# Altium PCB V1_0.PcbDoc
Units mm, origin at the board's own origin, x right, y up, seen from the top; angles counter-clockwise.
Board outline 83.82 x 79.88 mm, 2 copper layers (Top Layer, Bottom Layer); 29 components, 24 nets, 142 pads, 11 vias.
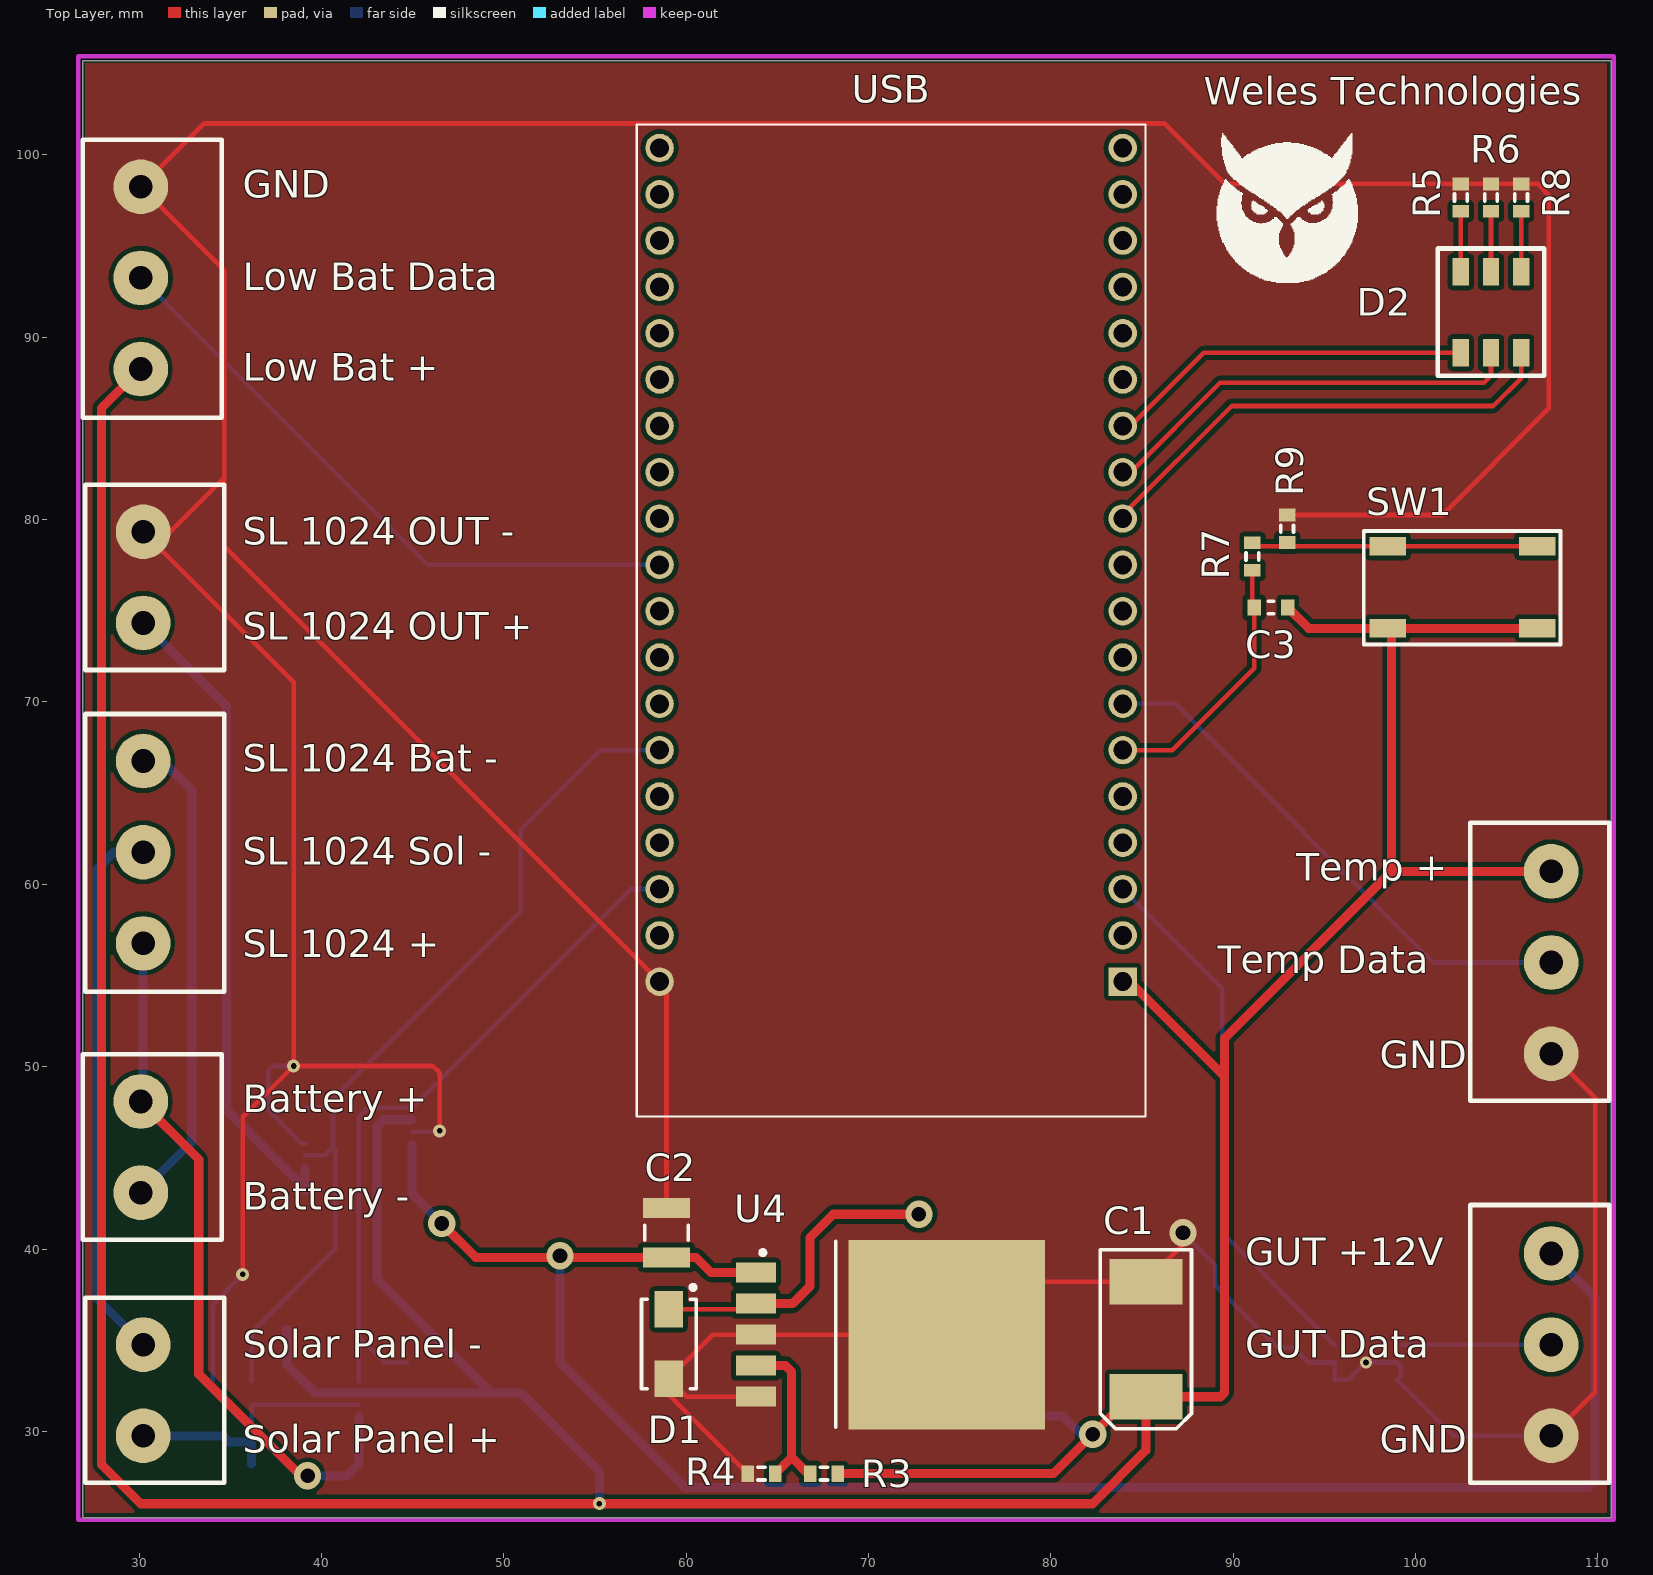
[diagram p0: Top Layer view]
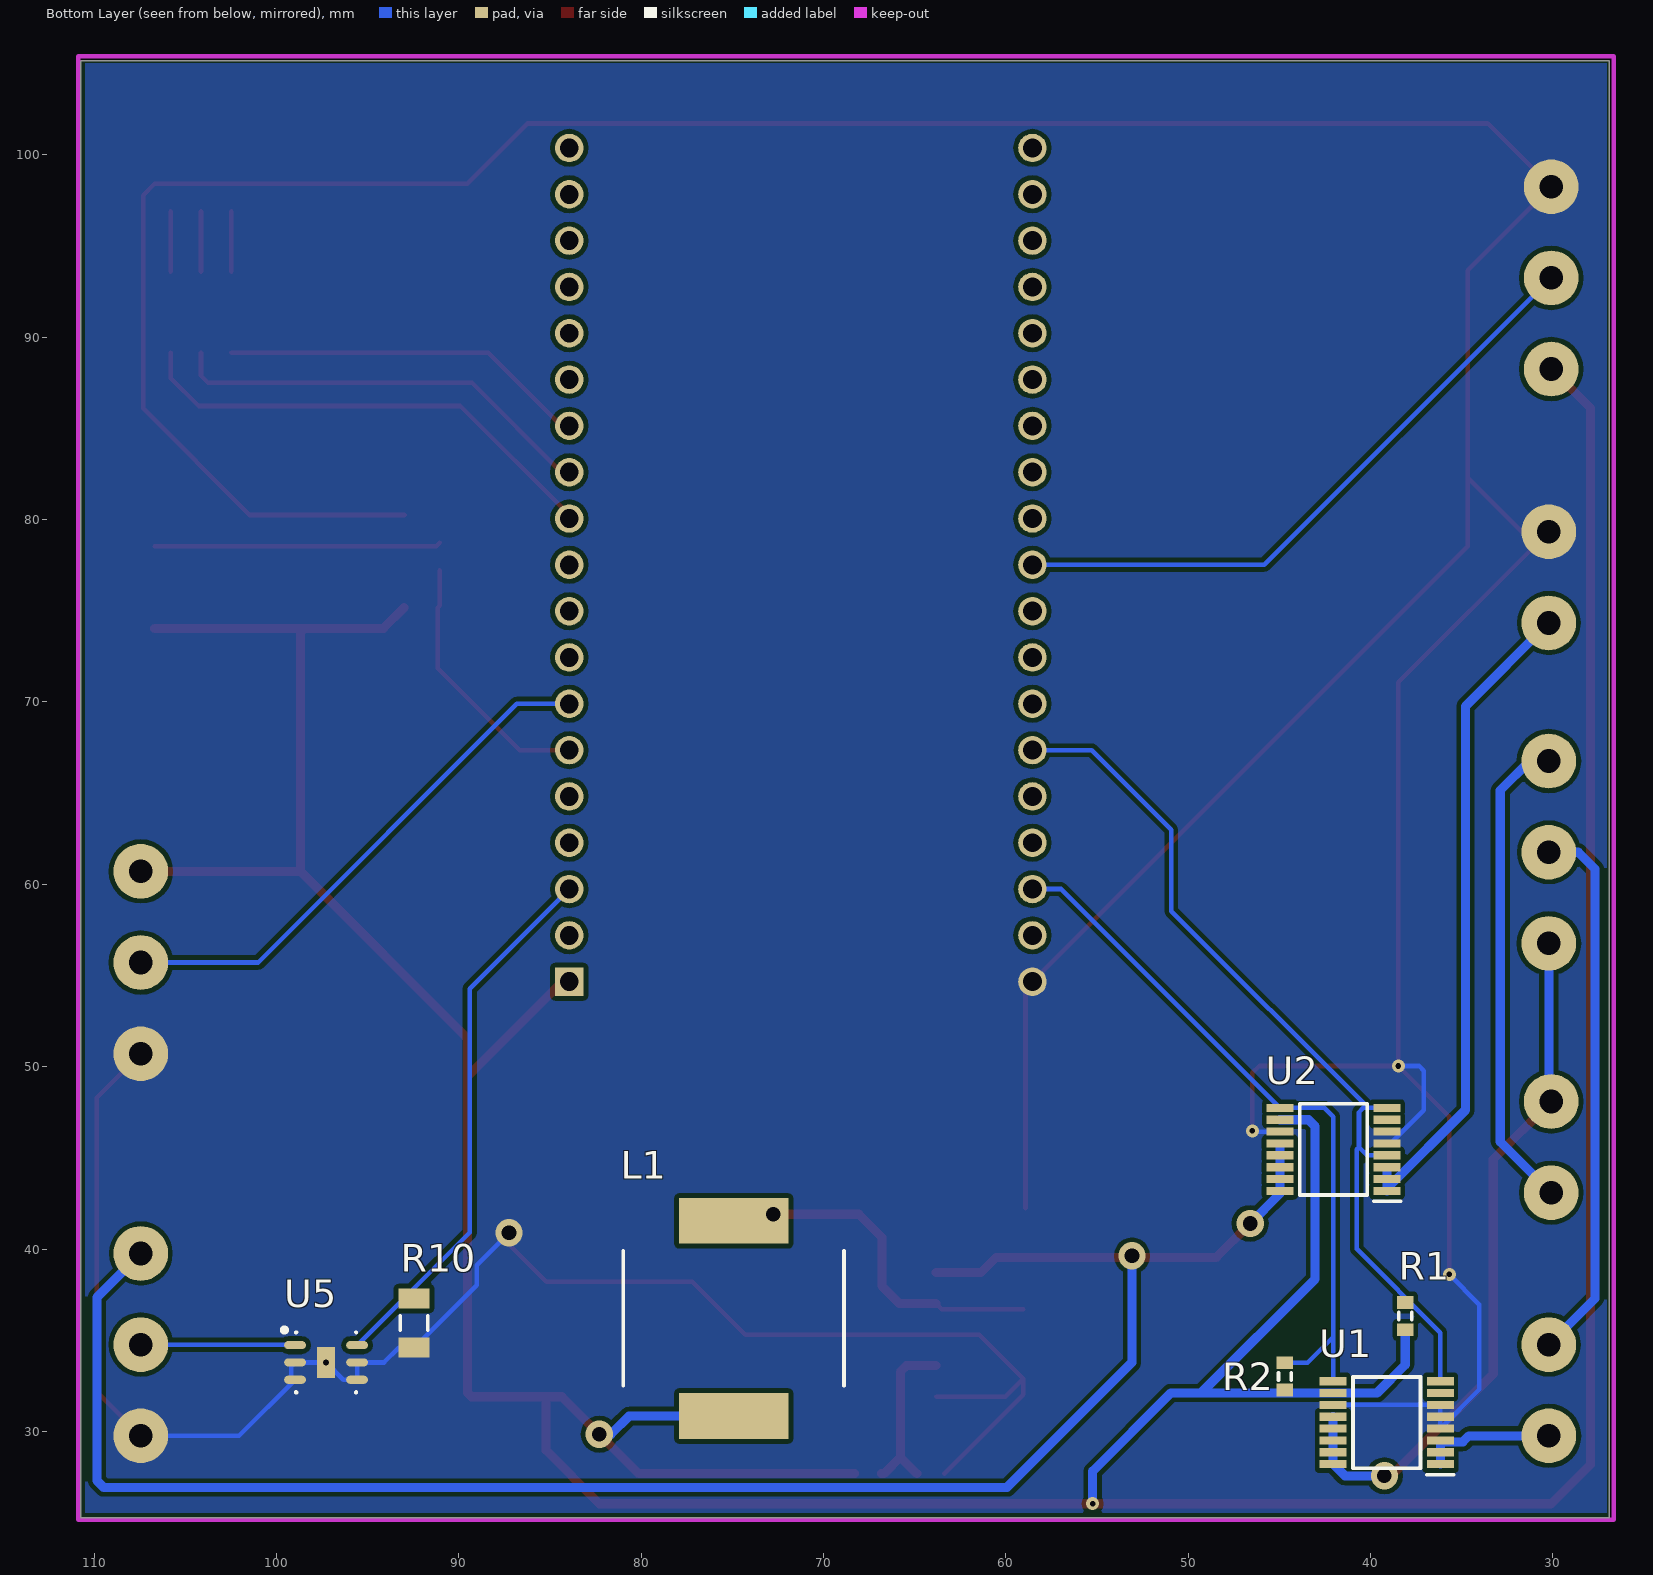
[diagram p1: Bottom Layer view, seen from below]
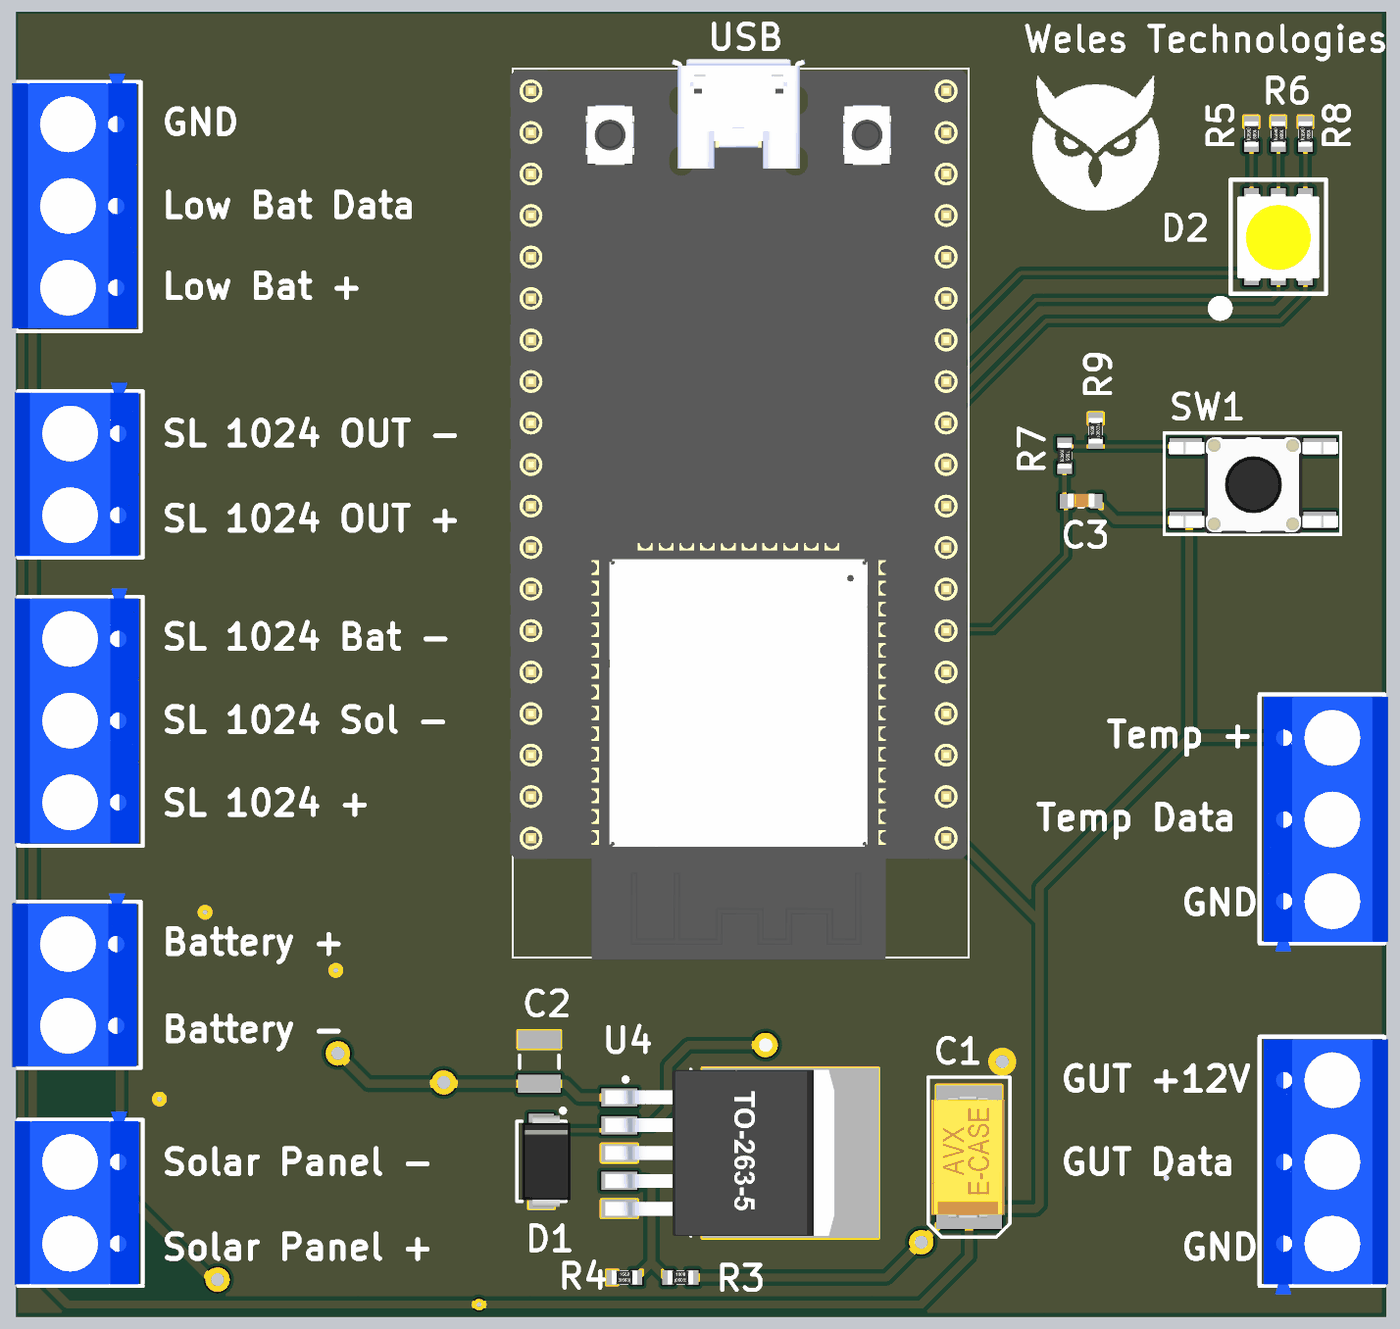
[diagram p2: 3D render of the assembled board from above, using the file's embedded part models]
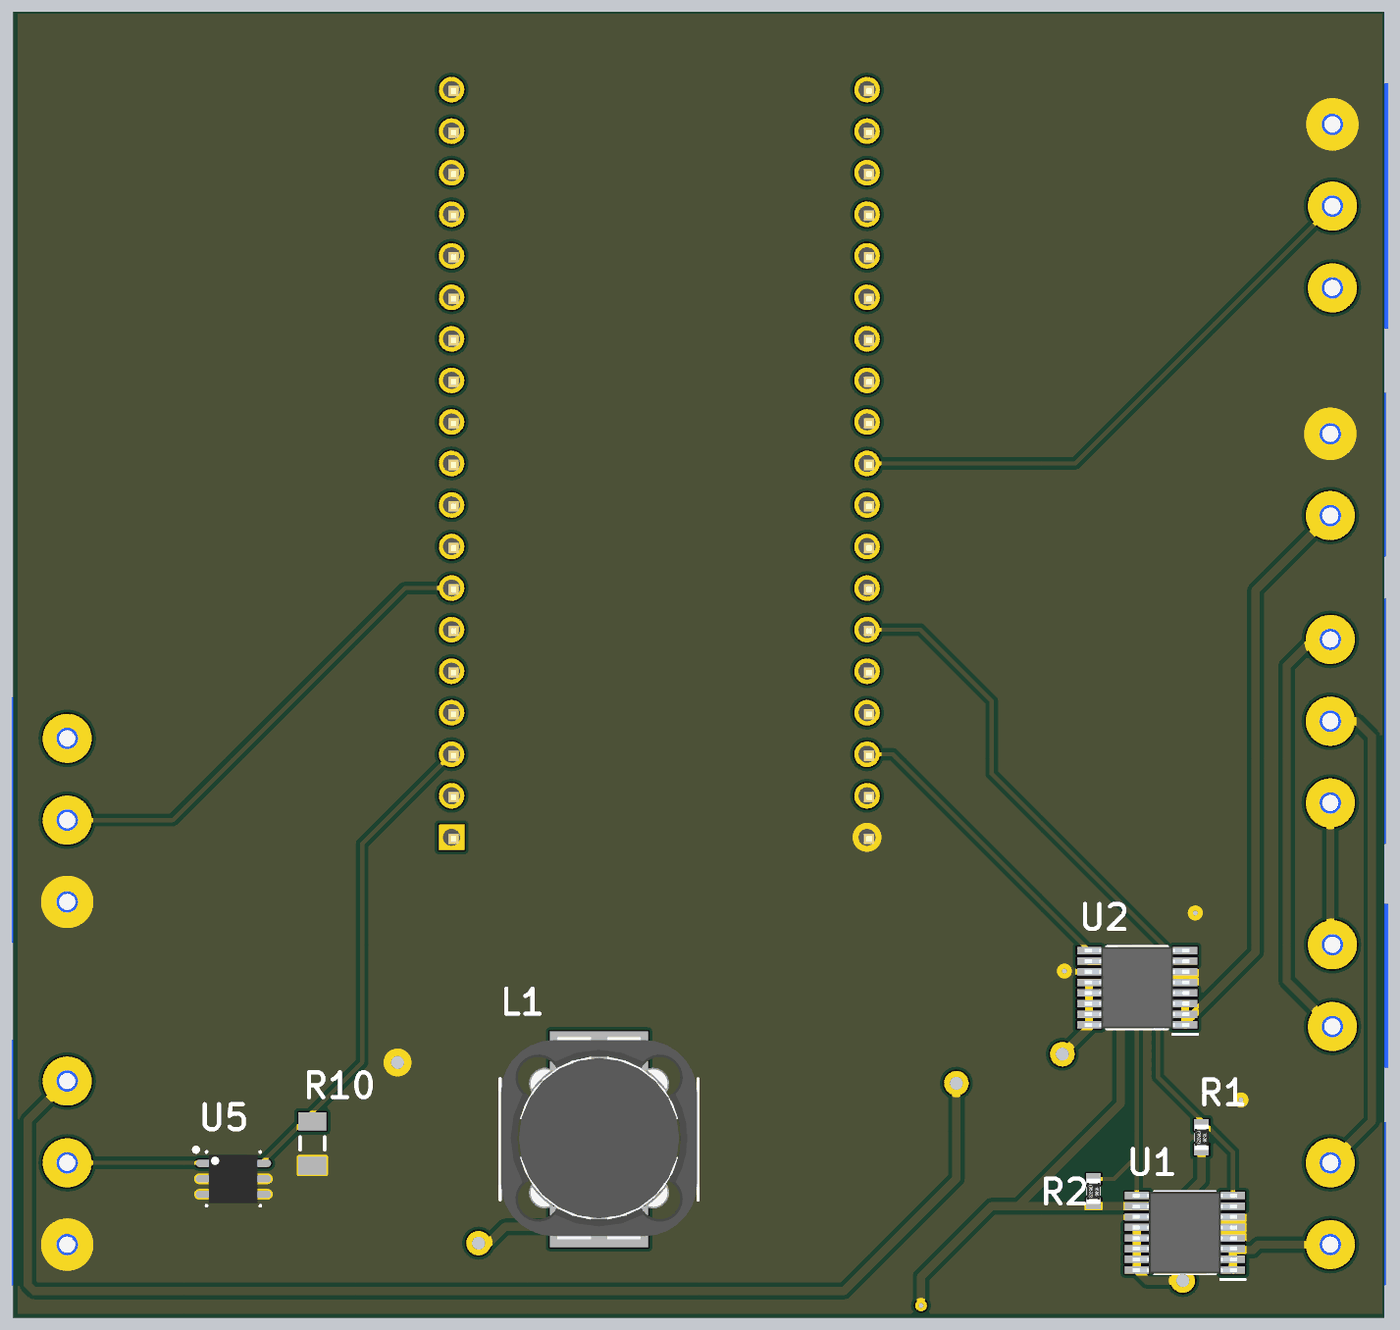
[diagram p3: 3D render of the assembled board from below, using the file's embedded part models]

## Layer stack, top to bottom
Top Solder: solder mask 0.0102, Solder Resist, Dk 3.5
Top Layer: signal copper 0.0356
Dielectric 1: dielectric 0.32, FR-4, Dk 4.8
Bottom Layer: signal copper 0.0356
Bottom Solder: solder mask 0.0102, Solder Resist, Dk 3.5

## Board outline
110.744,25.273 110.744,105.156 26.924,105.156 26.924,25.273

## Design rules (kind name [scope] priority, off if disabled: settings)
Clearance [All] p1: gap=0.254 ignorepadtopadclearanceinfootprint=FALSE except(0: Arc-Hole Track-Hole SMDPad-Hole THPad-Hole Via-Hole Fill-Hole Poly-Hole Region-Hole Text-Hole)
PolygonConnect [All] p1: connectstyle=Direct reliefconductorwidth=0.254 reliefentries=4 polygonreliefangle="90 Angle" airgapwidth=0.254
RoomDefinition V1_0 [InComponentClass('V1_0')] p1: confinementstyle=ConfineIn formatcopy=TRUE lockcomponents=FALSE outline 178.943,27.051 407.797,27.051 407.797,85.09 178.943,85.09
RoutingVias [All] p1: holewidth=0.711 width=1.27 viastyle="Through Hole" minholewidth=0.711 minwidth=1.27 maxholewidth=0.711 maxwidth=1.27
SolderMaskExpansion [All] p1: expansion=0.102
Width PWR [InNet('BAT+')] p1: maxlimit=0.5 minlimit=0.5 preferedwidth=0.5
Width [All] p2: maxlimit=0.254 minlimit=0.254 preferedwidth=0.254
30 further rules are at their usual default settings.

## Classes and differential pairs
component class V1_0: C1 C2 C3 D1 D2 L1 P1 P2 P3 P4 P5 P6 R1 R2 R3 R4 R5 R6 R7 R8 R9 R10 SW1 U1 U2 U4 U5

## Components (designator, comment, footprint, x,y, rotation, side; value= is the part's Value field where it differs from the comment)
C1 "Capacitor Tantalum" "Capacitor -Tantalum E size SMD" 85.217,35.052 r270 top value=220uF
C2 "Ceramic Capacitor" CAPC3225L 58.928,40.894 r270 top value=4,7uF
C3 "Capacitor" "CAP 0603" 92.075,75.184 r0 top value=0.1uF
D1 "Diode Schottky" DIOM4427X20N 59.055,34.798 r270 top
D2 "RGB 5050" "LED 5050" 105.791,89.154 r90 top
L1 "Coil" CDRH127 74.93,36.195 r90 bottom value=100uH
P1 "BAT" DG301_2pin 30.099,45.593 r270 top
P2 "SOLAR_PANEL" DG301_2pin 30.226,32.258 r270 top
P3 "SL1024 IN" DG301_3pin 30.226,64.262 r270 top
P4 "SL1024 OUT" DG301_2pin 30.226,76.835 r270 top
P5 "BAT_LOW_INDICATE" DG301_3pin 30.099,95.758 r270 top
P6 "GUT" DG301_3pin 107.442,32.258 r90 top
P7 "TEMP" DG301_3pin 107.442,53.213 r90 top
R1 "" RES1608 38.608,38.1 r270 bottom value=4.7K
R2 "" RES1608 45.212,34.798 r270 bottom value=4.7K
R3 "" RES1608 65.786,27.178 r0 top value=7.9K
R4 "" RES1608 62.357,27.178 r0 top value=4.7K
R5 "" RES1608 101.981,99.441 r270 top value=500
R6 "" RES1608 103.632,99.441 r270 top value=500
R7 "" RES1608 90.551,79.756 r270 top value=10K
R8 "" RES1608 105.283,99.441 r270 top value=500
R9 "" RES1608 93.472,77.724 r90 top value=100K
R10 "Resistor" RESC3216L 92.456,35.941 r90 bottom value=10K
SW1 "SW-34" SW-34 106.68,74.041 r180 top
U1 "INA260AIPW" SOP65P640X120-16N 39.116,30.48 r0 bottom
U2 "INA260AIPW" SOP65P640X120-16N 42.037,45.466 r0 bottom
U4 "IC" "TO170P1435X450-6N - duplicate" 70.358,35.306 r0 top
U5 "MAX14626" TDFN-6 97.282,33.782 r180 bottom
USB "ESP32-DEVKITC-32D" *MODULE_ESP32-DEVKITC-32D 71.247,74.422 r180 top (schematic designator U3)

## Footprints (in the part's own frame and the unit in brackets; to place one, negate y for a bottom-side part, rotate by r counter-clockwise, add the part's x,y. Pads: shape width x height; smd on the part's side, far side on the other; paste and mask are expansions set on the pad)
*MODULE_ESP32-DEVKITC-32D [mm]
  rect 1.56x1.56 hole 1.04: 1(-12.7,19.76)
  round 1.56 hole 1.04: 2(-12.7,17.22) 3(-12.7,14.68) 4(-12.7,12.14) 5(-12.7,9.6) 6(-12.7,7.06) 7(-12.7,4.52) 8(-12.7,1.98) 9(-12.7,-0.56) 10(-12.7,-3.1) 11(-12.7,-5.64) 12(-12.7,-8.18) 13(-12.7,-10.72) 14(-12.7,-13.26) 15(-12.7,-15.8) 16(-12.7,-18.34) 17(-12.7,-20.88) 18(-12.7,-23.42) 19(-12.7,-25.96) 20(12.7,19.76) 21(12.7,17.22) 22(12.7,14.68) 23(12.7,12.14) 24(12.7,9.6) 25(12.7,7.06) 26(12.7,4.52) 27(12.7,1.98) 28(12.7,-0.56) 29(12.7,-3.1) 30(12.7,-5.64) 31(12.7,-8.18) 32(12.7,-10.72) 33(12.7,-13.26) 34(12.7,-15.8) 35(12.7,-18.34) 36(12.7,-20.88) 37(12.7,-23.42) 38(12.7,-25.96)
  silkscreen extent -13.95,-27.25 13.95,27.15, body extent -13.84,-27.81 14.1,27.29, height 7.25
"CAP 0603" [mm] "Chip Capacitor, 2-Leads, Body 1,7x0,8mm, IPC Medium Density"
  rect 0.75x0.9 smd: 1(-0.925,0) 2(0.925,0)
  silkscreen extent -0.15,-0.35 0.15,0.35, body extent -0.85,-0.38 0.85,0.49, height 0.87
"Capacitor -Tantalum E size SMD" [mm]
  rect 2.5x4 smd: 1(-3.15,0) 2(3.15,0)
  silkscreen extent -4.9,-2.5 4.9,2.5, body extent -3.7,-2.29 3.7,2.16, height 4.2
CAPC3225L [mm] "Chip Capacitor, Body 3.2x2.5mm, IPC High Density"
  rect 1.1x2.6 smd: 1(-1.35,0) 2(1.35,0)
  silkscreen extent -0.4,-1.2 0.4,1.2, body extent -1.7,-1.35 1.7,1.35, height 1.5
CDRH127 [mm] "Chip Inductor, 2-Leads, Body 12.2x12.2mm, IPC Medium Density"
  rect 2.5x6 smd: 1(-5.35,0) 2(5.35,0)
  silkscreen extent -3.7,-6.05 3.7,6.05, body extent -6.1,-6 6.25,6, height 7.4
DG301_2pin [mm]
  round 3 hole 1.3: 1(-2.5,0) 2(2.5,0)
  silkscreen extent -5.08,-3.18 5.08,4.45, body extent -5.6,-3.4 5,4.2, height 10.1
DG301_3pin [mm]
  round 3 hole 1.3: 1(-2.5,0) 2(2.5,0) 3(7.5,0)
  silkscreen extent -5.08,-3.18 10.16,4.45, body extent -5.6,-3.4 10,4.2, height 10.1
DIOM4427X20N [mm] "Molded Diode, 2-Leads, Body 4,4x2,7mm, IPC Medium Density"
  rect 2x1.55 smd: 1(-1.905,0) 2(1.905,0)
  silkscreen extent -3.22,-1.5 2.45,1.5, body extent -2.8,-1.17 2.8,1.78, height 2.7
"LED 5050" [mm]
  round 1.524 on Top Overlay: 1(-2.159,5.207)
  rect 1.5x0.9 smd: 1(0,3.302) 2(0,1.651) 3(0,0) 4(4.445,3.302) 5(4.445,1.651) 6(4.445,0)
  silkscreen extent -1.27,-1.27 5.71,4.57, body extent -0.47,-0.85 4.83,4.15, height 1.6
RES1608 [mm]
  rect 0.7x0.9 smd: 1(1.028,0.508) 2(2.528,0.508)
  silkscreen extent 1.58,0.16 1.98,0.86, body extent 1,0.08 2.55,0.93, height 0.45
RESC3216L [mm] "Chip Resistor, Body 3.1x1.6mm, IPC High Density"
  rect 1.1x1.7 smd: 1(-1.35,0) 2(1.35,0)
  silkscreen extent -0.4,-0.75 0.4,0.75, body extent -1.68,-0.87 1.68,0.87, height 2.54
SOP65P640X120-16N [mm]
  rect 1.475x0.45 smd: 1(-2.938,2.275) 2(-2.938,1.625) 3(-2.938,0.975) 4(-2.938,0.325) 5(-2.938,-0.325) 6(-2.938,-0.975) 7(-2.938,-1.625) 8(-2.938,-2.275) 9(2.938,-2.275) 10(2.938,-1.625) 11(2.938,-0.975) 12(2.938,-0.325) 13(2.938,0.325) 14(2.938,0.975) 15(2.938,1.625) 16(2.938,2.275)
  silkscreen extent -3.67,-2.5 1.85,2.85, body extent -3.2,-2.5 3.2,2.5, height 1.2
SW-34 [mm]
  rect 2x1 smd: 1(0,0) 1(8.2,0) 2(0,-4.5) 2(8.2,-4.5)
  silkscreen extent -1.27,-5.33 9.53,0.89, body extent -1.11,-5.16 9.24,0.84, height 7.3
TDFN-6 [mm] "QFN, 12-Leads, Body 3.2x3.2mm (max), Pitch 0.95mm, IPC Medium Density"
  oval 1.2x0.45 smd: 1(-1.7,0.95) 2(-1.7,0) 3(-1.7,-0.95) 4(1.7,-0.95) 5(1.7,0) 6(1.7,0.95)
  rect 1x1.7 smd: 7(0,0)
  silkscreen extent -2.41,-1.65 1.65,1.9, body extent -1.54,-1.5 1.5,1.5, height 0.75
"TO170P1435X450-6N - duplicate" [mm] "D2-PAK, 6-Pads, Body 8,6x10,2mm (max), IPC Medium Density"
  rect 2.2x1.1 smd: 1(-6.531,3.4) 2(-6.531,1.7) 3(-6.531,0) 4(-6.531,-1.7) 5(-6.531,-3.4)
  rect 10.8x10.4 smd: 6(3.937,0)
  silkscreen extent -6.27,-5.08 -2.16,5.12, body extent -7.39,-5.1 7.85,5.1, height 4.56

## Part data
C1: library part Cap_tantal, Power/Voltage=10V, Tolerance=+-10%, PackageDescription=SMD, PackageReference=Size-E
C2: library part "Cap Semi", "Capacitor (Semiconductor SIM Model)", Power/Voltage=50V, Tolerance=+-10%, LatestRevisionDate=29-May-2009, LatestRevisionNote="IPC-7351 Footprint Added.", PackageDescription=SMD, PackageReference=C1210, Published=8-Jun-2000, Publisher="Altium Limited"
D1: library part Shotky_Diode, Manufacturer="International Rectifier", PartNumber=10MQ040NTRPBF, Name=10MQ040NTRPBF, PackageDescription="SMA (DO-214AC)"
L1: "Inductor", Manufacturer=Sumida, PartNumber=CDRH127/LD, Tolerance=+-20%
P1 P2 P4: library part 2_pin, "DG301"
P3 P5 P6 P7: library part 3_PIN, "DG301"
R1 R2 R3 R4 R5 R6 R7 R8 R9: library part "Res Semi", "Semiconductor Resistor", LatestRevisionDate=17-Jul-2002, LatestRevisionNote="Re-released for DXP Platform.", PackageReference=AXIAL-0.5, Published=8-Jun-2000, Publisher="Altium Limited"
R10: library part "Res Semi", "Semiconductor Resistor", Power/Voltage=0.25W, Tolerance=+-5%, LatestRevisionDate=17-Jul-2002, LatestRevisionNote="Re-released for DXP Platform.", PackageDescription=SMD, PackageReference=R1206, Published=8-Jun-2000, Publisher="Altium Limited"
U1 U2: "Integrated Circuit", Manufacturer_Name="Texas Instruments", Mouser Part Number=595-INA260AIPW, Datasheet Link=http://www.ti.com/lit/gpn/ina260, Height=1.2mm, Manufacturer_Part_Number=INA260AIPW, Mouser Price/Stock=https://www.mouser.com/Search/Refine.aspx?Keyword=595-INA260AIPW
U4: library part LM2575, Manufacturer="TEXAS INSTRUMENTS", PartNumber=LM2576, PackageDescription=TO-263-5
U5: "4–20mA  Current Loop Protector"
USB: "Eval Board For Esp-Wroom-32", Package=None, Availability=Unavailable, MF="Espressif Systems", MP=ESP32-DEVKITC-32D, Price=None, SnapEDA_Link=https://www.snapeda.com/parts/ESP32-DEVKITC-32D/Espressif%20Systems/view-part/?ref=snap

## Via types
v1: diameter 1.5, hole 0.8, Top Layer to Bottom Layer, 6 vias
v2: diameter 0.711, hole 0.305, Top Layer to Bottom Layer, 4 vias
v3: diameter 0.66, hole 0.33, Top Layer to Bottom Layer, tented top, 1 vias

## Nets (pads, with @x,y where several pads share a name; then routed paths per layer and width w, separated by ;. In a path a pad name is that pad's centre, name@x,y a point inside that pad or via, vN(x,y) a via of type N, cw(c..) or ccw(c..) an arc to the next point about the centre after c; other vN are vias at no path point)
1Wire: P7.2 USB.7 | length 29.4
  Bottom Layer w0.254: USB.7 86.816,69.902 101.005,55.713 P7.2
4_20mA_In: P6.2 U5.1 | length 8.2
  Bottom Layer w0.254: U5.1@99.21,34.758 P6.2
Analog_In: R10.2 U5.6 USB.3 | length 29.8
  Bottom Layer w0.254: USB.3 89.408,54.281 89.408,40.906 U5.6
BAT+: P1.1 P3.3 U1.12 U1.13 U1.14 U1.15 U1.16 | length 38.9
  Top Layer w0.5: P1.1 33.274,44.918 33.274,33.147 38.862,27.559 v1(39.243,27.559)
  Bottom Layer w0.5: P1.1 30.226,48.22 P3.3 ; v1(39.243,27.559) 41.408,27.559 U1.16 U1.15 U1.14 U1.13 U1.12
BAT-: P1.2 P3.1 | length 26.5
  Bottom Layer w0.5: P1.2 32.893,45.887 32.893,65.151 31.282,66.762 P3.1
Btn: C3.1 R7.2 USB.6 | length 14.5
  Top Layer w0.254: USB.6 86.666,67.362 91.15,71.846 C3.1 91.059,75.275 R7.2
"Discharge Notify": P5.2 USB.29 | length 35
  Bottom Layer w0.254: P5.2 45.835,77.522 USB.29
GND: C1.1 C2.1 D1.2 P4.1 P5.1 P6.1 P7.1 R4.1 R5.1 R6.1 R8.1 R9.2 R10.1 U1.4 U1.5 U1.6 U1.11 U2.5 U2.6 U2.11 U4.3 U4.5 U4.6 U5.2 U5.3 U5.4 U5.5 U5.7 USB.20 | length 358.2
  Top Layer w0.254: P4.1 31.71,79.335 34.671,82.296 ; P4.1@30.567,78.994 38.481,71.08 v2(38.481,50.038) ; v2(35.687,38.608) 35.687,47.244 v2(38.481,50.038) ; v2(46.482,46.482) 46.482,49.657 46.101,50.038 v2(38.481,50.038) ; C2.1 58.928,54.281 USB.20 34.671,78.538 34.671,82.296 ; R4.1 59.055,32.016 D1.2 ; U4.5 60.042,31.906 D1.2 ; v1(87.249,40.894) 87.249,40.234 C1.1 77.191,38.202 U4.6 U4.3 61.468,35.306 D1.2 ; R9.2 101.461,80.252 107.315,86.106 107.315,97.79 106.692,98.413 R8.1 R6.1 R5.1 89.547,98.413 86.233,101.727 33.568,101.727 P5.1 34.671,93.686 34.671,82.296 ; P6.1 109.855,32.171 109.855,48.3 P7.1
  Bottom Layer w0.254: v2(35.687,38.608) 34.036,36.957 34.036,32.297 U1.4 U1.5 U1.6 U1.11 ; v2(38.481,50.038) 37.338,50.038 37.084,49.784 37.084,47.605 38.898,45.791 U2.5 ; U2.11 46.441,46.441 v2(46.482,46.482) ; v1(87.249,40.894) 89.027,39.116 89.027,38.02 R10.1 93.298,34.591 94.107,33.782 U5.5 U5.4 96.332,32.832 v3(97.282,33.782) U5.2 99.187,33.577 99.187,33.037 U5.3 102.056,29.758 P6.1
IO12: D2.1@102.489,89.154 USB.13 | length 20.2
  Top Layer w0.254: USB.13 84.38,85.142 88.392,89.154 D2.1@102.489,89.154
IO14: D2.2 USB.12 | length 23.7
  Top Layer w0.254: USB.12 84.38,82.602 89.281,87.503 103.759,87.503 104.14,87.884 D2.2
IO27: D2.3 USB.11 | length 26.5
  Top Layer w0.254: USB.11 83.947,80.264 89.916,86.233 104.267,86.233 105.791,87.757 D2.3
NetD1_1: D1.1 L1.2 U4.2 | length 17.4
  Top Layer w0.254: D1.1 63.524,36.703 U4.2
  Top Layer w0.5: U4.2 65.835,37.006 66.802,37.973 66.802,40.64 68.072,41.91 v1(72.771,41.91)
NetD2_4: D2.4 R5.2 | length 3.3
  Top Layer w0.254: D2.4 R5.2
NetD2_5: D2.5 R6.2 | length 3.3
  Top Layer w0.254: D2.5 R6.2
NetD2_6: D2.6 R8.2 | length 3.3
  Top Layer w0.254: D2.6 R8.2
NetR3_1: R3.1 R4.2 U4.4 | length 9.5
  Top Layer w0.5: U4.4 65.454,33.606 65.786,33.274 65.786,28.587 ; R4.2 65.786,28.587 ; R3.1 66.687,27.686 65.786,28.587
NetR7_1: R7.1 R9.1 SW1.2 | length 15.7
  Top Layer w0.254: R7.1 91.246,78.541 98.48,78.541 SW1.2@106.68,78.541
SCL: R2.1 U1.9 U2.9 USB.22 | length 39.4
  Bottom Layer w0.254: U1.9 42.054,35.179 ; R2.1 43.463,33.77 42.054,35.179 ; USB.22 56.976,59.742 U2.9 42.534,47.741 42.054,47.261 42.054,35.179
SDA: R1.1 U1.8 U2.4 U2.8 USB.25 | length 49.2
  Bottom Layer w0.254: U1.8 36.178,35.416 40.767,40.005 40.767,45.466 40.64,45.593 ; U2.4 40.188,45.141 40.64,45.593 ; U2.8 40.132,47.741 ; USB.25 55.297,67.362 50.927,62.992 50.927,58.536 40.132,47.741 ; 40.132,47.741 40.397,47.741 40.64,47.498 40.64,45.593
SL_OUT+: P4.2 U2.1 U2.2 U2.3 | length 35.8
  Bottom Layer w0.5: P4.2 34.798,69.763 34.798,47.625 38.989,43.434 ; U2.1 U2.2 U2.3@39.099,44.412
SP+: P2.2 U1.1 U1.2 U1.3 | length 7.3
  Bottom Layer w0.5: P2.2 34.609,29.758 34.941,29.426 36.178,29.426 U1.2 U1.1
SP-: P2.1 P3.2 | length 30.1
  Bottom Layer w0.5: P2.1 27.686,37.298 27.686,60.833 28.615,61.762 P3.2
V_In: C2.2 P6.3 U2.12 U2.13 U2.14 U2.15 U2.16 U4.1 | length 102.4
  Top Layer w0.5: v1(46.609,41.402) 48.467,39.544 C2.2 60.532,39.544 61.37,38.706 U4.1
  Bottom Layer w0.5: U2.12@44.975,45.712 U2.13 U2.14 U2.15 U2.16 44.975,43.036 v1(46.609,41.402) ; v1(53.086,39.624) 53.086,33.782 59.944,26.924 109.474,26.924 109.855,27.305 109.855,37.345 P6.3
VCC: C1.2 C3.2 L1.1 P5.3 P7.3 R1.2 R2.2 R3.2 SW1.1 U1.10 U2.10 USB.1 | length 273.5
  Top Layer w0.5: P5.3 27.94,86.099 27.94,28.194 30.099,26.035 v2(55.245,26.035) 82.296,26.035 85.217,28.956 C1.2 ; R3.2 80.137,27.686 v1(82.296,29.845) 84.353,31.902 C1.2 ; USB.1@83.82,55.17 89.535,49.455 ; C3.2 94.143,74.041 SW1.1@98.48,74.041 ; SW1.1@106.68,74.041 SW1.1@98.48,74.041 ; P7.3 98.686,60.713 ; C1.2 89.306,31.902 89.535,32.131 89.535,49.455 ; 89.535,49.455 89.535,51.562 98.686,60.713 ; SW1.1@98.48,74.041 98.686,73.835 98.686,60.713
  Bottom Layer w0.5: R1.2 38.1,33.655 39.65,32.105 U1.10 49.302,32.105 ; U2.10 43.408,47.091 43.053,46.736 43.053,38.354 49.302,32.105 ; v2(55.245,26.035) 55.245,27.813 50.953,32.105 49.302,32.105 ; L1.1 80.661,30.845 81.661,29.845 v1(82.296,29.845)
pads on no net: D2.1@100.584,86.995 U1.7 U2.7 USB.2 USB.4 USB.5 USB.8 USB.9 USB.10 USB.14 USB.15 USB.16 USB.17 USB.18 USB.19 USB.21 USB.23 USB.24 USB.26 USB.27 USB.28 USB.30 USB.31 USB.32 USB.33 USB.34 USB.35 USB.36 USB.37 USB.38

## Polygon pours and split planes (outlines as drawn)
GND on Top Layer "Top Layer-No Net" (solid, remove dead copper, pour order 0): 26.67,105.41 26.67,25.146 110.744,25.146 110.871,25.273 110.871,105.41
GND on Bottom Layer "Top Layer-No Net" (solid, remove dead copper, pour order 2): 26.67,105.41 110.871,105.41 110.871,25.146 26.67,25.146

## Keep-outs
Keep-Out Layer:
  lines w0.254: 26.67,25.146 26.67,98.933 26.67,105.41 110.871,105.41 110.871,26.924 110.871,25.146 26.67,25.146

## Silkscreen, mask and mechanical layers (free items; w line width, h text height)
Top Overlay:
  drawing of 378 lines, arcs and shapes, not listed
  text "Weles Technologies" at 88.392,102.743 h1.52
  text "GND" at 35.687,97.663 h1.52
  text "Low Bat Data" at 35.687,92.583 h1.52
  text "Low Bat +" at 35.687,87.63 h1.52
  text "SL 1024 OUT -" at 35.687,78.613 h1.52
  text "SL 1024 OUT +" at 35.687,73.406 h1.52
  text "SL 1024 Bat -" at 35.687,66.167 h1.52
  text "SL 1024 Sol -" at 35.687,61.087 h1.52
  text "Temp +" at 93.472,60.198 h1.52
  text "SL 1024 +" at 35.687,56.007 h1.52
  text "Temp Data" at 89.154,55.118 h1.52
  text "GND" at 98.044,49.911 h1.52
  text "Battery +" at 35.687,47.498 h1.52
  text "Battery -" at 35.687,42.164 h1.52
  text "GUT +12V" at 90.678,39.116 h1.52
  text "Solar Panel -" at 35.687,34.036 h1.52
  text "GUT Data" at 90.678,34.036 h1.52
  text "Solar Panel +" at 35.687,28.829 h1.52
  text "GND" at 98.044,28.829 h1.52